# Altium PCB initial.PcbDoc
Units mil, origin at the board's own origin, x right, y up, seen from the top; angles counter-clockwise.
Board outline 3448.58 x 3722.15 mil, 2 copper layers (Top Layer, Bottom Layer); 73 components, 66 nets, 282 pads, 54 vias.
Unrouted connection lines stored in the file: 220.
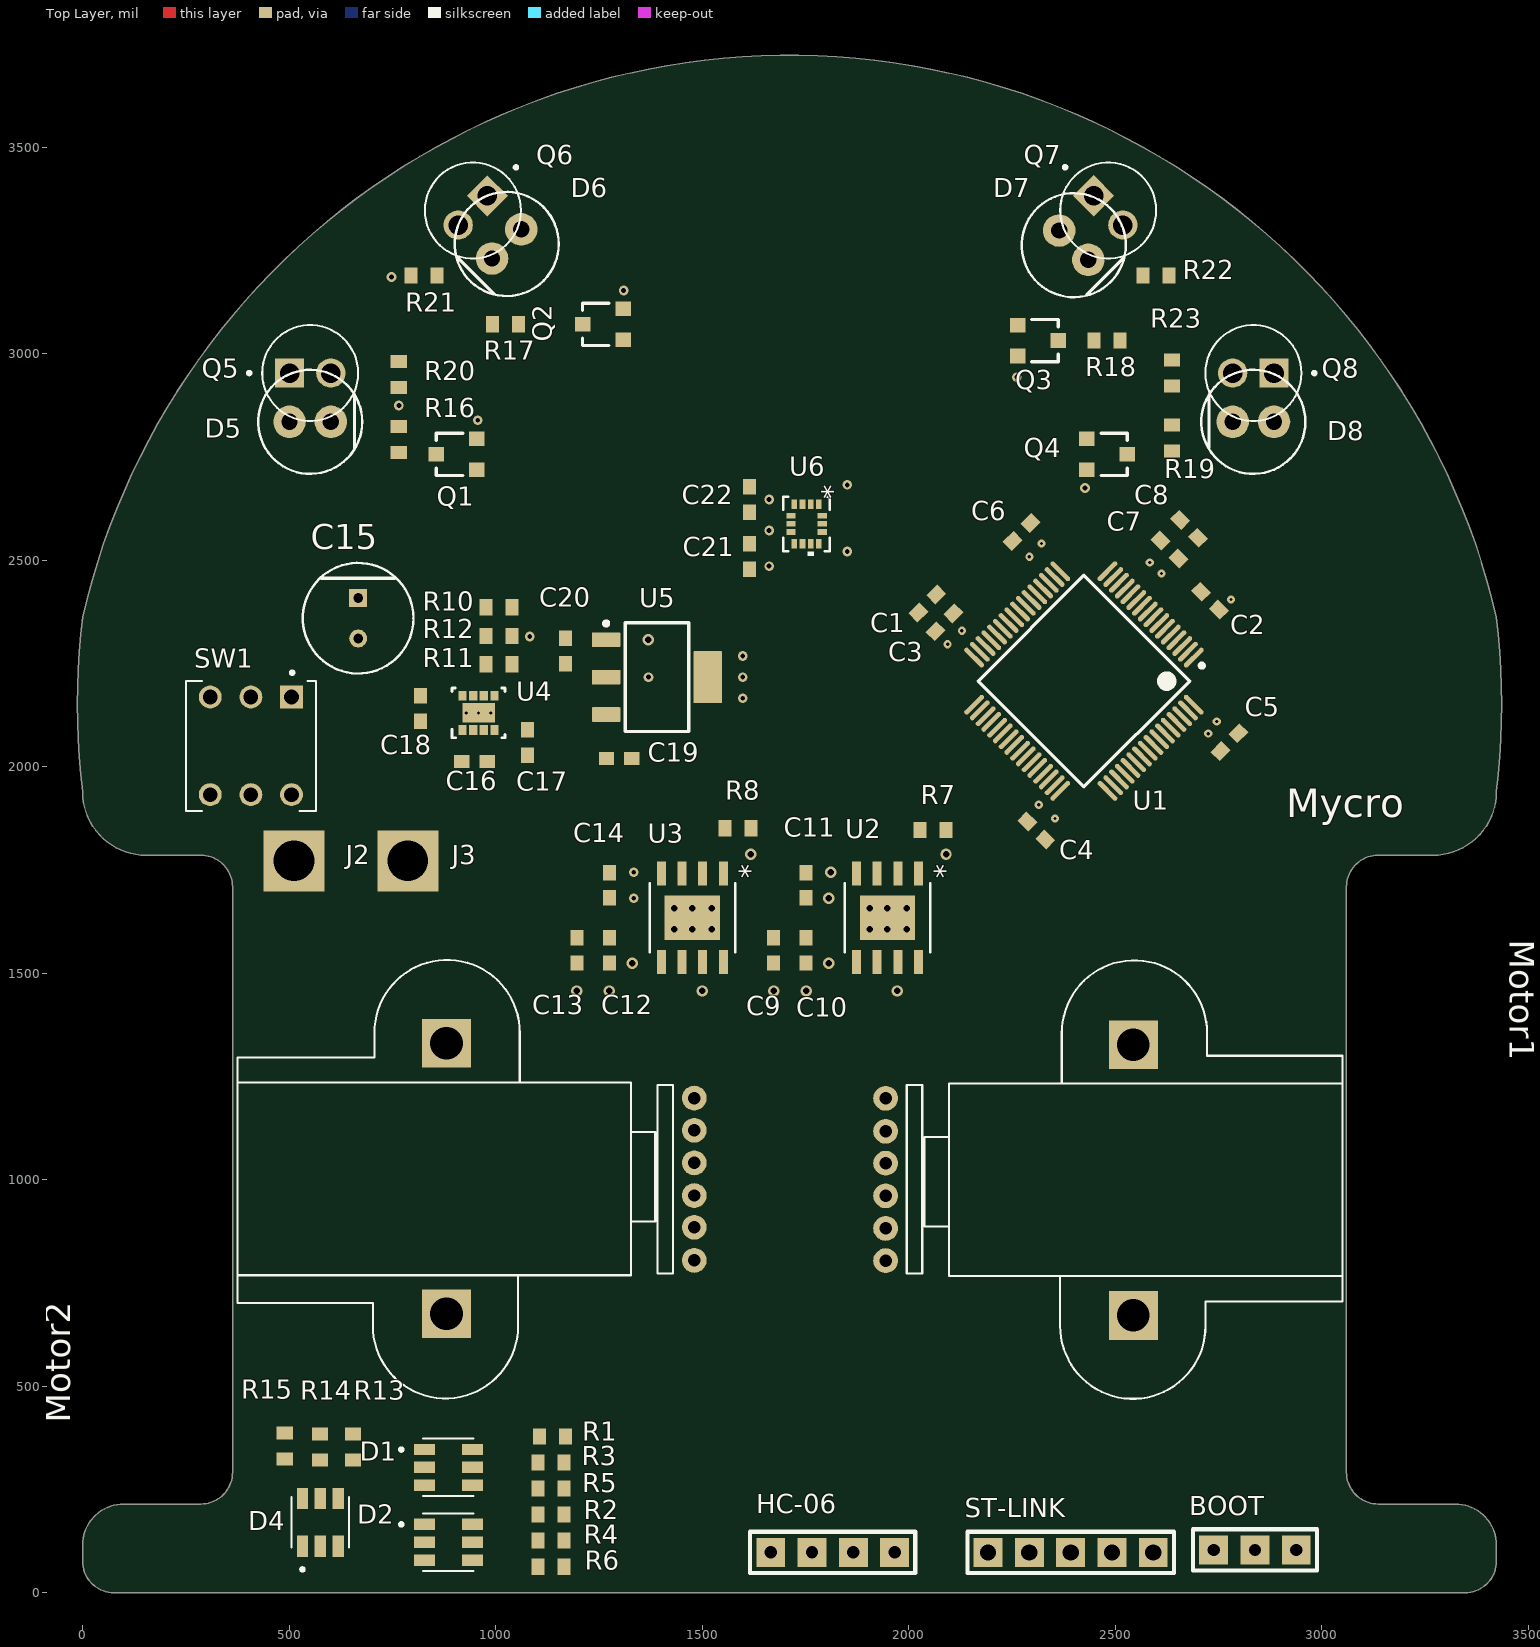
[diagram p0: Top Layer view]
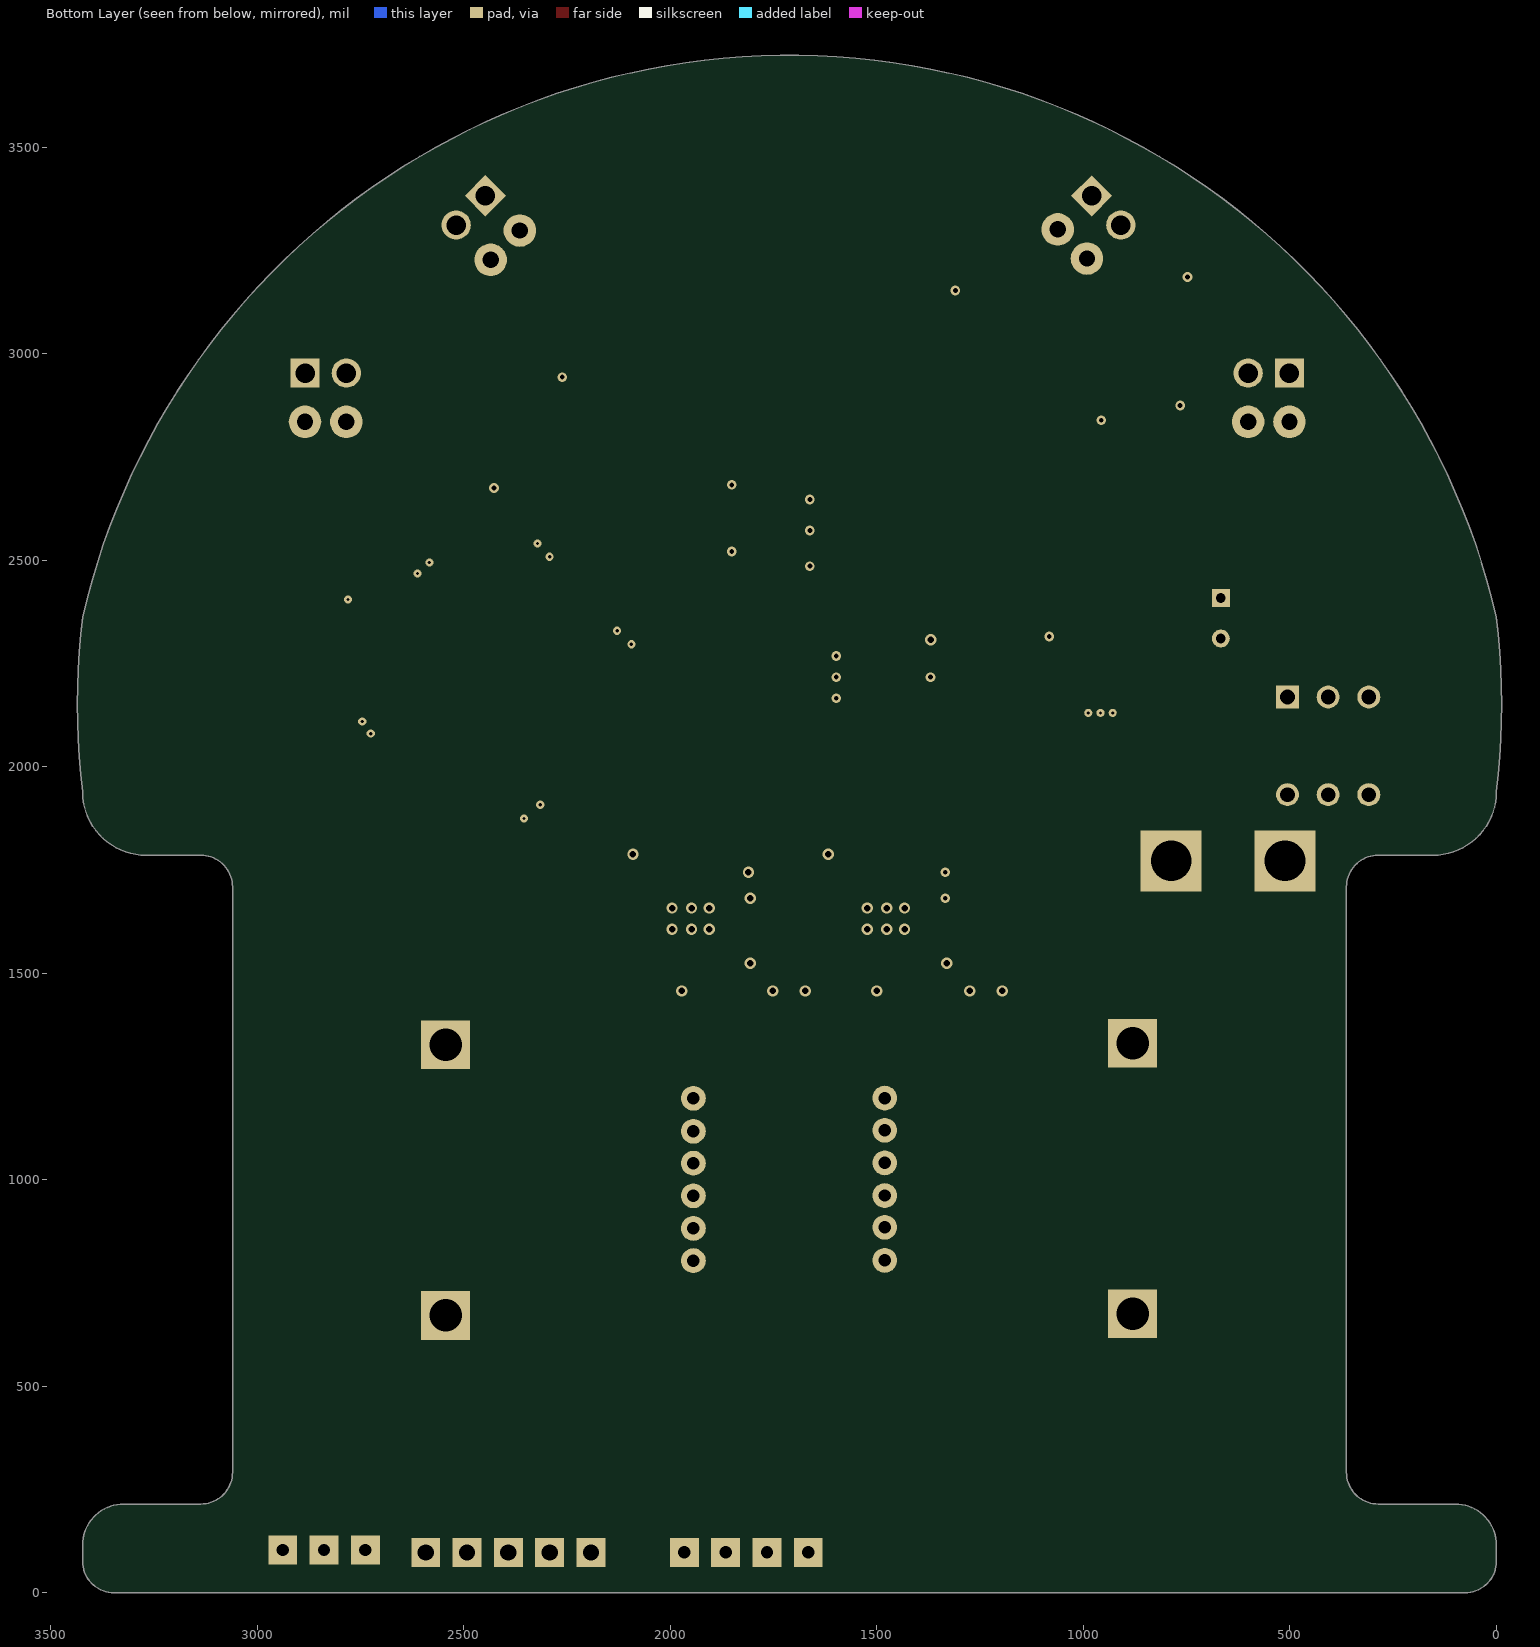
[diagram p1: Bottom Layer view, seen from below]

## Layer stack, top to bottom
Top Solder: solder mask 0.4, Solder Resist, Dk 3.5
Top Layer: signal copper 1.4
Dielectric 1: dielectric 12.6, FR-4, Dk 4.8
Bottom Layer: signal copper 1.4
Bottom Solder: solder mask 0.4, Solder Resist, Dk 3.5

## Board outline
0,76.07 ccw(c76.16,76.07) 76.16,-0.09 3347.06,-0.09 ccw(c3347.06,76.07) 3423.23,76.07 3423.23,114.87 ccw(c3323.68,114.87) 3323.68,214.42 3136.81,214.42 cw(c3136.81,291.2) 3060.04,291.2 3060.04,1708.57 cw(c3136.81,1708.57) 3136.81,1785.34 3269.04,1785.34 ccw(c3269.04,1939.52) 3423.23,1939.52 ccw(c1668.77,2150.82) 3423.23,2362.11 ccw(c1711.61,1965.17) 0,2362.11 ccw(c1754.46,2150.82) 0,1939.52 ccw(c154.18,1939.52) 154.18,1785.34 286.42,1785.34 cw(c286.42,1708.57) 363.19,1708.57 363.19,291.2 cw(c286.42,291.2) 286.42,214.42 286.42,214.52 257.87,214.52 257.87,214.42 99.55,214.42 ccw(c99.55,114.87) 0,114.87

## Design rules (kind name [scope] priority, off if disabled: settings)
BoardOutlineClearance [All] p1: gap=7.87 ignorepadtopadclearanceinfootprint=FALSE
Clearance [All] p1: gap=4 ignorepadtopadclearanceinfootprint=FALSE except(5: Arc-Via Track-Via SMDPad-Via THPad-Via Via-Via Via-Fill Via-Poly Via-Region Via-Text; 9.84: Arc-Hole Track-Hole SMDPad-Hole THPad-Hole Via-Hole Fill-Hole Poly-Hole Region-Hole Text-Hole)
ComponentClearance [All] p1: gap=4 collisioncheckmode=3 verticalgap=4 showdistances=TRUE
DiffPairsRouting [All] p1: maxlimit=4 minlimit=4 mostfreqgap=4 toplayer_minwidth=4 toplayer_maxwidth=71497.94 toplayer_prefwidth=4 bottomlayer_minwidth=4 bottomlayer_maxwidth=71497.94 bottomlayer_prefwidth=4 maxuncoupledlength=500
Height [All] p1: minheight=0 maxheight=71497.94 prefheight=500
HoleSize [All] p1: absolutevalues=TRUE maxlimit=248.03 minlimit=7.87 maxpercent=80.000 minpercent=20.000
HoleToHoleClearance [All] p1: gap=9.84 allowstackedmicrovias=FALSE
MinimumAnnularRing [All] p1: minimumring=3
MinimumSolderMaskSliver [All] p1: minsoldermaskwidth=0
PlaneClearance [All] p1: clearance=4
PlaneConnect PlaneConnectPowerPads [InPadClass('PowerPads')] p1: planeconnectstyle=Direct reliefexpansion=20 reliefentries=4 reliefconductorwidth=10 reliefairgap=10
PlaneConnect [All] p2: pad.planeconnectstyle=Relief pad.reliefexpansion=11.81 pad.reliefentries=4 pad.reliefconductorwidth=4 pad.reliefairgap=4 via.planeconnectstyle=Direct via.reliefexpansion=11.81 via.reliefentries=4 via.reliefconductorwidth=5 via.reliefairgap=5
PolygonConnect [All] p1: connectstyle=Direct reliefconductorwidth=10 reliefentries=4 polygonreliefangle="90 Angle" airgapwidth=10
RoutingVias [All] p1: holewidth=7.87 width=17.72 viastyle="Through Hole" minholewidth=7.87 minwidth=17.72 maxholewidth=248.03 maxwidth=257.87
SilkToSilkClearance [All] p1: silktosilkclearance=0
SilkToSolderMaskClearance [IsPad] p1: minsilkscreentomaskgap=4 clearancetoexposedcopper=TRUE
SolderMaskExpansion [All] p1: expansion=2.95 istentingtop=FALSE
SupplyNets "Schematic Supply Nets_4" [InNet('GND')] p1: voltage=0.000
SupplyNets "Schematic Supply Nets_3" [InNet('VCC')] p2: voltage=0.000
SupplyNets "Schematic Supply Nets_2" [InNet('+3V3')] p3: voltage=0.000
SupplyNets "Schematic Supply Nets_1" [InNet('Vbat')] p4: voltage=0.000
SupplyNets "Schematic Supply Nets" [InNet('+5')] p5: voltage=0.000
Width [All] p1: maxlimit=71497.94 minlimit=4 preferedwidth=4
20 further rules are at their usual default settings.

## Classes and differential pairs
component class 5_power: C15 C16 C17 C18 C19 C20 D4 J2 J3 R10 R11 R12 R13 R14 R15 SW1 U4 U5
component class 4_sensores: D5 D6 D7 D8 Q1 Q2 Q3 Q4 Q5 Q6 Q7 Q8 R16 R17 R18 R19 R20 R21 R22 R23
component class 3_imu: C21 C22 U6
component class 2_drivers_e_Motores: C9 C10 C11 C12 C13 C14 Motor1 Motor2 R7 R8 U2 U3
component class 1_micro: BOOT C1 C2 C3 C4 C5 C6 C7 C8 D1 D2 HC-06 R1 R2 R3 R4 R5 R6 ST-LINK U1

## Components (designator, comment, footprint, x,y, rotation, side; value= is the part's Value field where it differs from the comment)
BOOT "CONECTOR_3PIN" CON3 2938.58,103.35 r180 top
C1 "CAP" 0603 2045.28,2394.68 r225 top
C2 "CAP" 0603 2729.33,2401.57 r135 top
C3 "CAP" 0603 2086.61,2349.41 r225 top
C4 "CAP" 0603 2309.06,1845.47 r315 top
C5 "CAP" 0603 2776.57,2059.06 r45 top
C6 "CAP" 0603 2273.62,2567.91 r225 top
C7 "CAP" 0603 2631.89,2525.59 r135 top
C8 "CAP" 0603 2679.13,2575.79 r135 top
C9 "CAP" 0603 1673.23,1555.12 r270 top
C10 "CAP" 0603 1751.97,1555.12 r270 top
C11 "CAP" 0603 1751.97,1712.6 r90 top
C12 "CAP" 0603 1275.59,1555.12 r270 top
C13 "CAP" 0603 1196.85,1555.12 r270 top
C14 "CAP" 0603 1275.59,1712.6 r90 top
C15 "56uF" FP-PSG-F05-MFG 667.32,2359.25 r270 top
C16 "CAP" 0603 948.82,2011.81 r180 top
C17 "CAP" 0603 1077.73,2058.02 r90 top
C18 "CAP" 0603 818.68,2140.94 r90 top
C19 "CAP" 0603 1299.21,2019.68 r180 top
C20 "CAP" 0603 1169.29,2279.53 r270 top
C21 "CAP" 0603 1615.16,2508.86 r270 top
C22 "CAP" 0603 1615.16,2646.65 r90 top
D1 "KRTBLSLPS1.32-VUVX-EQ+BTBV-D8+TWTZ-L1-B" LED_KRTBLSLPS1.32-VUVX-EQ+BTBV-D8+TWTZ-L1-B 885.83,303.15 r0 top
D2 "KRTBLSLPS1.32-VUVX-EQ+BTBV-D8+TWTZ-L1-B" LED_KRTBLSLPS1.32-VUVX-EQ+BTBV-D8+TWTZ-L1-B 885.83,122.05 r0 top
D4 "KRTBLSLPS1.32-VUVX-EQ+BTBV-D8+TWTZ-L1-B" LED_KRTBLSLPS1.32-VUVX-EQ+BTBV-D8+TWTZ-L1-B 575.79,170.28 r90 top
D5 "SFH 4550" FP-SFH_4550-MFG 551.18,2834.65 r180 top
D6 "SFH 4550" FP-SFH_4550-MFG 1026.87,3265.32 r45 top
D7 "SFH 4550" FP-SFH_4550-MFG 2399.79,3262.32 r135 top
D8 "SFH 4550" FP-SFH_4550-MFG 2834.65,2834.65 r0 top
HC-06 "" CON4 1666.14,97.44 r0 top
J2 "FURO" FURO_2,5MM 511.81,1771.65 r0 top
J3 "FURO" FURO_2,5MM 787.4,1771.65 r0 top
Motor1 "Micro Motor c/ Encoder" "Micro Metal c/ Encoder" 2023.11,370.76 r0 top
Motor2 "Micro Motor c/ Encoder" "Micro Metal c/ Encoder" 1402.32,1630.5 r180 top
Q1 "2N7002" STM-SOT-23-3_V 905.51,2755.91 r90 top
Q2 "2N7002" STM-SOT-23-3_V 1259.84,3070.87 r90 top
Q3 "2N7002" STM-SOT-23-3_V 2312.99,3031.5 r270 top
Q4 "2N7002" STM-SOT-23-3_V 2480.31,2755.91 r270 top
Q5 "SFH313" XDCR_BPW96B 551.18,2952.76 r0 top
Q6 "SFH313" XDCR_BPW96B 944.88,3346.46 r225 top
Q7 "SFH313" XDCR_BPW96B 2483.27,3346.57 r315 top
Q8 "SFH313" XDCR_BPW96B 2834.65,2952.76 r180 top
R1 "RESISTOR" "RES 0603" 1137.8,377.95 r180 top value=100R
R2 "RESISTOR" "RES 0603" 1133.86,188.98 r180 top value=100R
R3 "RESISTOR" "RES 0603" 1133.86,314.96 r180 top value=100R
R4 "RESISTOR" "RES 0603" 1133.86,125.98 r180 top value=100R
R5 "RESISTOR" "RES 0603" 1133.86,251.97 r180 top value=100R
R6 "RESISTOR" "RES 0603" 1133.86,62.99 r180 top value=100R
R7 "RESISTOR" "RES 0603" 2059.06,1846.46 r180 top value=1k
R8 "RESISTOR" "RES 0603" 1586.61,1850.39 r180 top value=1k
R10 "RESISTOR" "RES 0603" 1007.87,2385.83 r180 top value=100k
R11 "RESISTOR" "RES 0603" 1007.87,2248.03 r0 top value=52k3
R12 "RESISTOR" "RES 0603" 1007.87,2315.98 r180 top value=10k
R13 "RESISTOR" "RES 0603" 654.53,352.36 r90 top value=1k
R14 "RESISTOR" "RES 0603" 574.8,352.36 r90 top value=1k
R15 "RESISTOR" "RES 0603" 489.31,355.13 r90 top value=1k
R16 "RESISTOR" "RES 0603" 765.75,2792.32 r90 top value=180R
R17 "RESISTOR" "RES 0603" 1023.62,3070.87 r180 top value=180R
R18 "RESISTOR" "RES 0603" 2480.31,3031.5 r0 top value=180R
R19 "RESISTOR" "RES 0603" 2637.8,2795.28 r90 top value=180R
R20 "RESISTOR" "RES 0603" 765.75,2948.82 r90 top value=68R
R21 "RESISTOR" "RES 0603" 826.77,3188.98 r0 top value=68R
R22 "RESISTOR" "RES 0603" 2598.43,3188.98 r180 top value=68R
R23 "RESISTOR" "RES 0603" 2637.8,2952.76 r90 top value=68R
ST-LINK "CONECTOR_5PIN" CON5 2192.32,97.44 r0 top
SW1 "TL2285EE" SW_TL2285EE 407.48,2050.2 r180 top
U1 "STM32F411RET6TR" STM-LQFP64_L 2424.38,2206.96 r225 top
U2 "DRV8251ADDAR" SOIC8_DDA_TEX 1948.82,1633.86 r270 top
U3 "DRV8251ADDAR" SOIC8_DDA_TEX 1476.38,1633.86 r270 top
U4 "TPS82140SILR" SIL0008D_SMD 958.66,2129.92 r90 top
U5 "TLV1117LV33" DCY0004A_N 1390.75,2216.54 r0 top
U6 "LSM6DSRXTR" LGA-14L_STM 1752.95,2587.6 r270 top

## Footprints (in the part's own frame and the unit in brackets; to place one, negate y for a bottom-side part, rotate by r counter-clockwise, add the part's x,y. Pads: shape width x height; smd on the part's side, far side on the other; paste and mask are expansions set on the pad)
0603 [mm]
  rect 0.95x0.8 smd: 1(-0.78,0) 2(0.78,0)
  body extent -0.8,-0.4 0.8,0.4, height 0.78
CON3 [mil]
  rect 70x70 hole 30: 1(0,0) 2(100,0) 3(200,0)
  silkscreen extent -50,-50 250,50, body extent -39,-47 239,46, height 519
CON4 [mil]
  rect 70x70 hole 30: 1(0,0) 2(100,0) 3(200,0) 4(300,0)
  silkscreen extent -50,-50 350,50, body extent -50,-47 343,45, height 519
CON5 [mil]
  rect 70x70 hole 39.37: 1(0,0) 2(100,0) 3(200,0) 4(300,0) 5(400,0)
  silkscreen extent -50,-50 450,50, body extent -50,-47 443,45, height 519
DCY0004A_N [mm] "SOT223, 4-Leads, Body 6.7x3.7mm, Pitch 2.3mm, IPC Medium Density"
  rrect11% 1.75x0.9 smd: 1(-3.125,2.3) 2(-3.125,0) 3(-3.125,-2.3)
  rrect6% 1.75x3.2 smd: 4(3.125,0)
  silkscreen extent -3.25,-3.35 1.95,3.42, body extent -3.5,-3.25 3.5,3.25, height 1.62
FP-PSG-F05-MFG [mm]
  rect 1.1x1.1 hole 0.6 paste-2539.97 mask+0: 1(-1.25,0)
  round 1.1 hole 0.6 paste-2539.97 mask+0: 2(1.25,0)
  silkscreen extent -3.4,-3.4 3.4,3.4, body extent -3.5,-3.5 3.5,3.5, height 0.25
FP-SFH_4550-MFG [mm]
  round 2 hole 1 paste-2539.97 mask+0: 1(-1.27,0) 2(1.27,0)
  silkscreen extent -3.2,-3.2 3.2,3.2, body extent -3.05,-3.05 3.05,3.05, height 0.25
FURO_2,5MM [mm]
  rect 3.75x3.75 hole 2.5: 1(0,0)
LED_KRTBLSLPS1.32-VUVX-EQ+BTBV-D8+TWTZ-L1-B [mm]
  rect 1.3x0.7 smd paste-0.05: A1(1.475,1.1) A2(1.475,0) A3(1.475,-1.1) C1(-1.475,1.1) C2(-1.475,0) C3(-1.475,-1.1)
  silkscreen extent -3,-1.77 1.55,1.77
LGA-14L_STM [mm]
  rect 0.577x0.352 smd paste+0 mask+0.102: 1(-1.21,0.75) 2(-1.21,0.25) 3(-1.21,-0.25) 4(-1.21,-0.75) 8(1.21,-0.75) 9(1.21,-0.25) 10(1.21,0.25) 11(1.21,0.75)
  rect 0.352x0.577 smd paste+0 mask+0.102: 5(-0.5,-0.956) 6(0,-0.956) 7(0.5,-0.956) 12(0.5,0.956) 13(0,0.956) 14(-0.5,0.956)
  silkscreen extent -1.68,-1.42 1.96,1.42, body extent -1.55,-1.3 1.55,1.3, height 0.87
"Micro Metal c/ Encoder" [mil] "Motor pololu com encoder e mancal acoplados"
  round 60 hole 30: 1(-78.74,433.07) 2(-78.74,511.07) 3(-78.74,590.07) 4(-78.74,669.07) 5(-78.74,746.07) 6(-78.74,826.07)
  rect 118.11x118.11 hole 78.74: 1(521.18,300.5) 1(521.18,955.5)
  silkscreen extent -28,99 1028,1160, body extent -193,0 1402,1259, height 866
"RES 0603" [mm]
  rect 0.8x1 smd: 1(-0.8,0) 2(0.8,0)
  body extent -0.8,-0.41 0.8,0.41, height 0.46
SIL0008D_SMD [mm]
  rect 0.6x0.5 smd paste-0.05 mask-0.051: 1(-1.05,0.975) 2(-1.05,0.325) 3(-1.05,-0.325) 4(-1.05,-0.975) 5(1.05,-0.975) 6(1.05,-0.325) 7(1.05,0.325) 8(1.05,0.975)
  rect 1.2x2 smd paste-0.6 mask-0.051: 9(0,0)
  round 0.5 / inner round 1.524 / far side round 0.5 hole 0.203 paste-2539.97 mask-0.051: V(0,0.75) V(0,0) V(0,-0.75)
  silkscreen extent -1.53,-1.63 1.53,1.63, body extent -1.4,-1.5 1.4,1.5, height 1.31
SOIC8_DDA_TEX [mil]
  rect 57.5x22 smd paste+0 mask+0: 1(-107.25,75) 2(-107.25,25) 3(-107.25,-25) 4(-107.25,-75) 5(107.25,-75) 6(107.25,-25) 7(107.25,25) 8(107.25,75)
  rect 107x134 smd paste-66.5 mask+0: 9(0,0)
  silkscreen extent -84,-104 84,104, body extent -122,-99 122,99, height 67
STM-LQFP64_L [mm] "QFP, 64-Leads, Body 10x10mm, Pitch 0.5mm, IPC High Density"
  oval 1.6x0.3 smd: 1(-5.8,3.75) 2(-5.8,3.25) 3(-5.8,2.75) 4(-5.8,2.25) 5(-5.8,1.75) 6(-5.8,1.25) 7(-5.8,0.75) 8(-5.8,0.25) 9(-5.8,-0.25) 10(-5.8,-0.75) 11(-5.8,-1.25) 12(-5.8,-1.75) 13(-5.8,-2.25) 14(-5.8,-2.75) 15(-5.8,-3.25) 16(-5.8,-3.75) 33(5.8,-3.75) 34(5.8,-3.25) 35(5.8,-2.75) 36(5.8,-2.25) 37(5.8,-1.75) 38(5.8,-1.25) 39(5.8,-0.75) 40(5.8,-0.25) 41(5.8,0.25) 42(5.8,0.75) 43(5.8,1.25) 44(5.8,1.75) 45(5.8,2.25) 46(5.8,2.75) 47(5.8,3.25) 48(5.8,3.75)
  oval 0.3x1.6 smd: 17(-3.75,-5.8) 18(-3.25,-5.8) 19(-2.75,-5.8) 20(-2.25,-5.8) 21(-1.75,-5.8) 22(-1.25,-5.8) 23(-0.75,-5.8) 24(-0.25,-5.8) 25(0.25,-5.8) 26(0.75,-5.8) 27(1.25,-5.8) 28(1.75,-5.8) 29(2.25,-5.8) 30(2.75,-5.8) 31(3.25,-5.8) 32(3.75,-5.8) 49(3.75,5.8) 50(3.25,5.8) 51(2.75,5.8) 52(2.25,5.8) 53(1.75,5.8) 54(1.25,5.8) 55(0.75,5.8) 56(0.25,5.8) 57(-0.25,5.8) 58(-0.75,5.8) 59(-1.25,5.8) 60(-1.75,5.8) 61(-2.25,5.8) 62(-2.75,5.8) 63(-3.25,5.8) 64(-3.75,5.8)
  silkscreen extent -5.92,-4.6 4.6,4.6, body extent -5,-5 5,5, height 1.6
STM-SOT-23-3_V [mm] "SOT23, 3-Leads, Body 3.016x2.8mm, Pitch 0.95mm"
  rect 0.9x0.95 smd: 1(-0.95,-1.25) 2(0.95,-1.25) 3(0,1.25)
  silkscreen extent -1.3,-0.38 1.3,1.25, body extent -1.14,-1.25 1.17,1.36, height 1.25
SW_TL2285EE [mm]
  rect 1.408x1.408 / inner round 1.408 / far side rect 1.408x1.408 hole 0.9: 1(-2.5,-3)
  round 1.408 hole 0.9: 2(0,-3) 3(2.5,-3) 4(-2.5,3) 5(0,3) 6(2.5,3)
  silkscreen extent -4,-4.6 4,4, body extent -4,-4 4,4, height 13.5
XDCR_BPW96B [mm]
  rect 1.8x1.8 hole 1.2: C(-1.27,0)
  round 1.8 hole 1.2: E(1.27,0)
  silkscreen extent -3.85,-2.95 2.95,2.95

## Part data
C1 C2 C3 C4 C5 C6 C7 C8 C9 C10 C11 C12 C13 C14 C16 C17 C18 C19 C20 C21 C22: library part "CAP. CERÂMICO", "Capacitor", Criado em=26/06/2012, Criador por="Luigi Eduardo", Pertence a=Trincabotz
  C1 C3: Valor=4.7uF
  C2 C5 C6 C7 C8 C10 C11 C13 C14 C19 C20 C21 C22: Valor=100nF
  C4: Valor=1uF
  C9 C12: Valor=47uF
  C16 C17: Valor=22uF
  C18: Valor=33nF
C15: library part CMP-33769-000002-1, "CAP ALUM POLY 56UF 20% 25V T/H / APSG250ELL560MF05S / https://www.mouser.com/ProductDetail/Chemi-Con/APSG250ELL560MF05S?qs=nxZbHzLpdvcfhTNzSmDv4w%3D%3D", Leakage Current=500uA, Manufacturer="United Chemi-Con", Manufacturer Part Number=APSG250ELL560MF05S, Package=PSG-F05, Ripple Current=2600mA, Temperature="-55°C to +105°C", Temperature Range High=+105°C, Temperature Range Low=-55°C, Tolerance=20%, Voltage Rating=25V, Automotive=No, Capacitance=56uF, Category=Cap, ComponentLink2Description=Datasheet, ComponentLink2URL=http://www.chemi-con.co.jp/cgi-bin/CAT_DB/SEARCH/cat_db_al.cgi?e=e&j=p&pdfname=psg, Device Class L1="Passive Components", Device Class L2=Capacitors, Device Class L3="Polymer Capacitors", Digikey Description="CAP ALUM POLY 56UF 20% 25V T/H", Dissipation Factor=12%, Esr=30mΩ, Height=6mm, Lead Free=Yes, Life=15000Hours, Material=Polymer, Octopart=https://octopart.com/apsg250ell560mf05s-united+chemi-con-70515924, RoHS=TRUE
D1 D2 D4: "Red, Green, Blue (RGB) 621nm Red, 532nm Green, 467nm Blue LED Indication - Discrete 2.05V Red, 2.65V Green, 2.85V Blue 6-SMD, J-Lead", Package="SMD-6 OSRAM Opto Semiconductors Inc.", Availability="In Stock", Check_prices=https://www.snapeda.com/parts/KRTBLSLPS1.32-VUVX-EQ+BTBV-D8+TWTZ-L1-B/OSRAM+Opto+Semiconductors+Inc./view-part/?ref=eda, MF="OSRAM Opto Semiconductors Inc.", MP=KRTBLSLPS1.32-VUVX-EQ+BTBV-D8+TWTZ-L1-B, Price=None, Purchase-URL=https://pricing.snapeda.com/search/part/KRTBLSLPS1.32-VUVX-EQ+BTBV-D8+TWTZ-L1-B/?ref=eda, SnapEDA_Link=https://www.snapeda.com/parts/KRTBLSLPS1.32-VUVX-EQ+BTBV-D8+TWTZ-L1-B/OSRAM+Opto+Semiconductors+Inc./view-part/?ref=snap
D5 D6 D7 D8: library part CMP-62016-000011-1, "EMITTER IR 860NM 100MA RADIAL", Colour=Infrared, Forward Current=100mA, Forward Voltage=1.5V, Manufacturer="Osram Opto", Reverse Voltage=5V, Temperature="-40°C to +100°C", Temperature Range High=+100°C, Temperature Range Low=-40°C, Automotive=No, Category=Diode, ComponentLink2Description=Datasheet, ComponentLink2URL=https://dammedia.osram.info/media/resource/hires/osram-dam-5580407/SFH%204550_EN.pdf, Device Class L1=Optoelectronics, Device Class L2=LEDs, Device Class L3=unset, Digikey Description="EMITTER IR 860NM 100MA RADIAL", Lead Free=Yes, Led Orientation=Straight, Manufacturer Part Number="SFH 4550", Mouser Description="Infrared Emitters - High Power Infrared 850 nm HALF ANGLE +/-3DEG", Octopart=https://octopart.com/sfh+4550-osram+opto-55410894, Package="SFH 4550", Peak Emmision Wavelength=860nm, RoHS=TRUE, Viewing Angle=6°
HC-06: library part CONECTOR_4PIN
J2 J3: library part "FURO NA PLACA", "Furo", Criado em=26/06/2012, Criado por="Luigi Eduardo", Pertence a="Trincabotz CEFET-MG"
Q1 Q2 Q3 Q4: library part CMP-0434-00001-1, "N-channel 60 V, 1.8 Ohm, 0.35 A STripFET(TM) II Power MOSFET, SOT23", Manufacturer=STMicroelectronics, ComponentLink1Description="Manufacturer URL", ComponentLink1URL=http://www.st.com/, ComponentLink2Description=Datasheet, ComponentLink2URL=http://www.st.com/st-web-ui/static/active/en/resource/technical/document/datasheet/CD00005134.pdf, DatasheetVersion="Rev. 9, 11/2008", Mounting Technology="Surface Mount", PackageDescription="3-Pin SOT23, 3.016 x 2.8 mm Body, 0.95 mm Pitch", PackageReference=SOT-23, PartNumber=2N7002
Q5 Q6 Q7 Q8: library part BPW96B, "Phototransistors 850nm Top View Radial, 5mm Dia (T 1 3/4)", Package="Radial Vishay Semiconductor", Availability=Warning, DigiKey-Purchase-URL=https://snapeda.com/shop?store=DigiKey&id=112630, MF="Vishay Semiconductor", Mouser-Purchase-URL=https://snapeda.com/shop?store=Mouser&id=112630, MP=BPW96B, Price=None, SnapEDA_Link=https://www.snapeda.com/parts/BPW96B/Vishay/view-part/112630/?ref=snap
R1 R2 R3 R4 R5 R6 R7 R8 R10 R11 R12 R13 R14 R15 R16 R17 R18 R19 R20 R21 R22 R23: "Resistor"
SW1: Package=None, Availability=Unavailable, MP=TL2285EE, Price=None
U1: library part CMP-0243-00169-2, "ARM Cortex-M4 32-bit MCU+FPU, 512 KB Flash, 128 KB RAM, 50 I/Os, 64-Pin LQFP, -40 to 85 degC, Tape and Reel", I/Os (High Current)=50, Operating Frequency(F) (Processor speed) (MHz)=100, Package Description=LQFP64, Package Reference="64-Pin Low-profile Quad Flat Package, Body 10 x 10 mm, Pitch 0.5 mm", Supply Voltage(Vcc) min (V)=1.7, ComponentLink1Description="Manufacturer URL", ComponentLink1URL=http://www.st.com/, ComponentLink2Description=Datasheet, ComponentLink2URL=http://www.st.com/st-web-ui/static/active/en/resource/technical/document/datasheet/DM00115249.pdf, Core="ARM Cortex-M4", DatasheetVersion="Rev. 6", FLASH Size (Prog) (kB)=512, Internal RAM Size (kB)=128, Mounting Technology="Surface Mount", Packing="Tape and Reel"
U2 U3 U4: "No Description Available", Mfr_Name="Texas Instruments", RefDes=RefDes
  U2 U3: Type=Type
  U4: Type=TYPE
U5: library part CMP-0395-00503-2, "Single Output LDO, 1 A, Fixed 3.3 V Output, 2 to 5.5 V Input, 4-pin SOT-223 (DCY), -40 to 125 degC, Green (RoHS & no Sb/Br)", Manufacturer="Texas Instruments", PartNumber=TLV1117LV33DCYR, Accuracy(%)=2, Code_JEDEC=TO-261, ComponentLink1Description="Manufacturer URL", ComponentLink1URL=http://www.ti.com/, ComponentLink2Description=Datasheet, ComponentLink2URL=http://www.ti.com/general/docs/lit/getliterature.tsp?genericPartNumber=TLV1117LV33&fileType=pdf, ComponentLink3Description="Package Specification", ComponentLink3URL=http://www.ti.com/litv/pdf/mpds094a, DatasheetVersion=SBVS160A, Eco-Plan="Green (RoHS & no Sb/Br)", Fixed Output Options(V)=3.3, Iout(Max)(A)=1, Iq(Typ)(mA)=0.05, Mounting Technology="Surface Mount", PackageDescription="4-Pin Plastic Small Outline, Body 3.5 x 6.5 mm, Pitch 2.3 mm", PackageReference=DCY0004A, PackageVersion=4202506/B, SubFamily="Single Channel LDO", Vdo(Typ)(mV)=1200, Vin(Max)(V)=5.5, Vin(Min)(V)=2, Vout Adj(Max)(V)=3.3, Vout Adj(Min)(V)=3.3
U6: "No Description Available", Mfr_Name=STMicroelectronics, RefDes=RefDes, Type=Type

## Via types
v1: diameter 27.56, hole 15.75, Top Layer to Bottom Layer, 25 vias
v2: diameter 23.62, hole 11.81, Top Layer to Bottom Layer, 18 vias
v3: diameter 19.68, hole 7.87, Top Layer to Bottom Layer, 11 vias

## Nets (pads, with @x,y where several pads share a name; then routed paths per layer and width w, separated by ;. In a path a pad name is that pad's centre, name@x,y a point inside that pad or via, vN(x,y) a via of type N, cw(c..) or ccw(c..) an arc to the next point about the centre after c; other vN are vias at no path point)
3V3B: D4.A1 R15.1
5VG: D4.A2 R14.1
+3V3: BOOT.3 C1.2 C3.2 C4.2 C5.2 C6.2 C7.2 C8.2 C11.2 C14.2 C20.2 C21.2 C22.2 D5.2 D6.2 D7.2 D8.2 HC-06.4 Motor1.4 Motor2.4 Q5.C Q6.C Q7.C Q8.C R15.2 ST-LINK.2 U1.1 U1.13 U1.19 U1.32 U1.48 U1.64 U2.4 U3.4 U5.2 U5.4 U6.2 U6.3 U6.5 U6.8
  other v1: 1811.02,1744.09
  other v2: 1334.65,1744.09 1598.43,2165.35 1370.08,2216.54 1598.43,2216.54 1598.43,2267.72 1662.4,2485.24 1662.4,2646.65
  other v3: 2354.33,1874.02 2746.06,2109.25 2094.49,2296.26 2583.66,2494.09 2292.32,2507.87
+5: C17.2 C19.2 R10.1 R11.2 R14.2 U4.4 U4.5 U5.3
ADC_SENS0: Q5.E R20.2 U1.11
ADC_SENS1: Q6.E R21.2 U1.10
ADC_SENS2: Q7.E R22.2 U1.16
ADC_SENS3: Q8.E R23.2 U1.17
BOOT0: BOOT.2 U1.60
CURR_DRV1: R7.2 U1.26 U2.1
CURR_DRV2: R8.2 U1.8 U3.1
ENCODER1_1: Motor1.3 U1.14
ENCODER1_2: Motor1.2 U1.15
ENCODER2_1: Motor2.3 U1.55
ENCODER2_2: Motor2.2 U1.50
FB_5V: R11.1 R12.2 U4.6
FET_GATE0: Q1.1 U1.34
FET_GATE1: Q2.1 U1.35
FET_GATE2: Q3.1 U1.36
FET_GATE3: Q4.1 U1.37
GND: BOOT.1 C2.1 C3.1 C4.1 C5.1 C6.1 C7.1 C8.1 C9.1 C10.1 C11.1 C12.1 C13.1 C14.1 C15.1 C16.1 C17.1 C18.1 C19.1 C20.1 C21.1 C22.1 D1.C1 D1.C2 D1.C3 D2.C1 D2.C2 D2.C3 D4.C1 D4.C2 D4.C3 HC-06.3 J3.1 Motor1.1 Motor2.1 Q1.2 Q2.2 Q3.2 Q4.2 R7.1 R8.1 R12.1 R20.1 R21.1 R22.1 R23.1 ST-LINK.1 U1.12 U1.18 U1.31 U1.47 U1.63 U2.7 U2.9 U3.7 U3.9 U4.3 U4.9 U5.1 U6.6 U6.7 U6.12
  other v1: 1972.44,1456.69 1433.07,1606.3 1476.38,1606.3 1523.62,1606.3 1905.51,1606.3 1948.82,1606.3 1996.06,1606.3 1433.07,1657.48 1476.38,1657.48 1523.62,1657.48 1905.51,1657.48 1948.82,1657.48 1996.06,1657.48 1807.09,1681.1 1618.11,1787.4 2090.55,1787.4 1370.08,2307.09
  other v2: 1334.65,1681.1 1082.68,2314.96 1851.38,2520.67 1662.4,2571.85 956.69,2838.58
  other v3: 2314.96,1907.48 2725.39,2079.72 2128.94,2328.74 2780.51,2404.53 2612.2,2467.52 2321.85,2540.35
HC06-RX: HC-06.2 U1.43
HC06-TX: HC-06.1 U1.42
INPUT_DRV1: U1.40 U2.2
INPUT_DRV2: U1.56 U3.2
Interrupt1_IMU: U1.20 U6.4
Interrupt2_IMU: U1.24 U6.9
LEDB1: D1.A1 R1.2
LEDB2: D2.A1 R2.2
LEDG1: D1.A2 R3.2
LEDG2: D2.A2 R4.2
LEDR1: D1.A3 R5.2
LEDR2: D2.A3 R6.2
MOTOR1_1: Motor1.6 U2.6
MOTOR1_2: Motor1.5 U2.8
MOTOR2_1: Motor2.6 U3.6
MOTOR2_2: Motor2.5 U3.8
NetD5_1: D5.1 R16.2
NetD6_1: D6.1 R17.2
NetD7_1: D7.1 R18.2
NetD8_1: D8.1 R19.2
NetQ1_3: Q1.3 R16.1
NetQ2_3: Q2.3 R17.1
NetQ3_3: Q3.3 R18.1
NetQ4_3: Q4.3 R19.1
NetR1_1: R1.1
NetR2_1: R2.1
NetR3_1: R3.1
NetR4_1: R4.1
NetR5_1: R5.1
NetR6_1: R6.1
NRST: C2.2 ST-LINK.3 U1.7
PG_5V: R10.2 U4.7
PWM_DRV1: U1.41 U2.3
PWM_DRV2: U1.57 U3.3
PWM_FAN: U1.39
SPI_MISO: U1.22 U6.1
SPI_MOSI: U1.23 U6.14
SPI_SCK: U1.21 U6.13
SS_reg5V: C18.2 U4.8
SWCLK: ST-LINK.5 U1.49
SWDIO: ST-LINK.4 U1.46
Vbat: J2.1 SW1.4
VCAP: C1.1 U1.30
VCC: C9.2 C10.2 C12.2 C13.2 C15.2 C16.2 R13.2 SW1.5 U2.5 U3.5 U4.1 U4.2
  other v1: 1196.85,1456.69 1275.59,1456.69 1673.23,1456.69 1751.97,1456.69 1330.71,1523.62 1807.09,1523.62
VccR: D4.A3 R13.1
pads on no net: SW1.1 SW1.2 SW1.3 SW1.6 U1.2 U1.3 U1.4 U1.5 U1.6 U1.9 U1.25 U1.27 U1.28 U1.29 U1.33 U1.38 U1.44 U1.45 U1.51 U1.52 U1.53 U1.54 U1.58 U1.59 U1.61 U1.62 U4.V U6.10 U6.11
copper on no net:
  other v1: 1500,1456.69
  other v2: 2427.17,2674.21 1851.38,2682.09 765.75,2874.02 2261.81,2942.91 1310.04,3152.56 748.03,3185.04

## Silkscreen, mask and mechanical layers (free items; w line width, h text height)
Top Overlay:
  text "Mycro" at 2914.62,1854.33 h118.11
Mechanical 1:
  lines w10: 257.87,214.52 286.42,214.52 ccw(c286.42,291.29) 363.19,291.29 363.19,370.03 363.19,1629.88 363.19,1708.62 ; 257.87,1785.43 286.42,1785.43 cw(c286.42,1708.66) 363.19,1708.66 ; 363.19,1708.53 363.19,1629.79 363.19,369.94 363.19,291.2 cw(c286.42,291.2) 286.42,214.42 257.87,214.42 99.55,214.42 ccw(c99.55,114.87) 0,114.87 0,76.07 ccw(c76.16,76.07) 76.16,-0.09 3347.06,-0.09 ccw(c3347.06,76.07) 3423.23,76.07 3423.23,114.87 ccw(c3323.68,114.87) 3323.68,214.42 3165.35,214.42 3136.81,214.42 cw(c3136.81,291.2) 3060.04,291.2 3060.04,369.94 3060.04,1629.79 3060.04,1708.53 ; 363.19,1708.57 ccw(c286.42,1708.57) 286.42,1785.34 154.18,1785.34 cw(c154.18,1939.52) 0,1939.52 cw(c1754.46,2150.82) 0,2362.11 cw(c1711.61,1965.17) 3423.23,2362.11 cw(c1668.77,2150.82) 3423.23,1939.52 cw(c3269.04,1939.52) 3269.04,1785.34 3136.81,1785.34 ccw(c3136.81,1708.57) 3060.04,1708.57 ; 3062.01,1708.62 3062.01,1629.88 3062.01,370.03 3062.01,291.29 ccw(c3138.78,291.29) 3138.78,214.52 ; 3062.01,1708.66 cw(c3138.78,1708.66) 3138.78,1785.43

## Text inside footprints (layer, text, board x,y; h text height)
U2: Top Overlay "*" at 2040.82,1763.61 h50 r270; Top 3D Body "*" at 1994.32,1709.86 h50 r270
U3: Top Overlay "*" at 1568.38,1763.61 h50 r270; Top 3D Body "*" at 1521.88,1709.86 h50 r270
U6: Top Overlay "*" at 1767.32,2682.1 h50 r270; Top 3D Body "*" at 1767.32,2638.4 h50 r270